# EAGLE board vr2 (EAGLE 4.16)
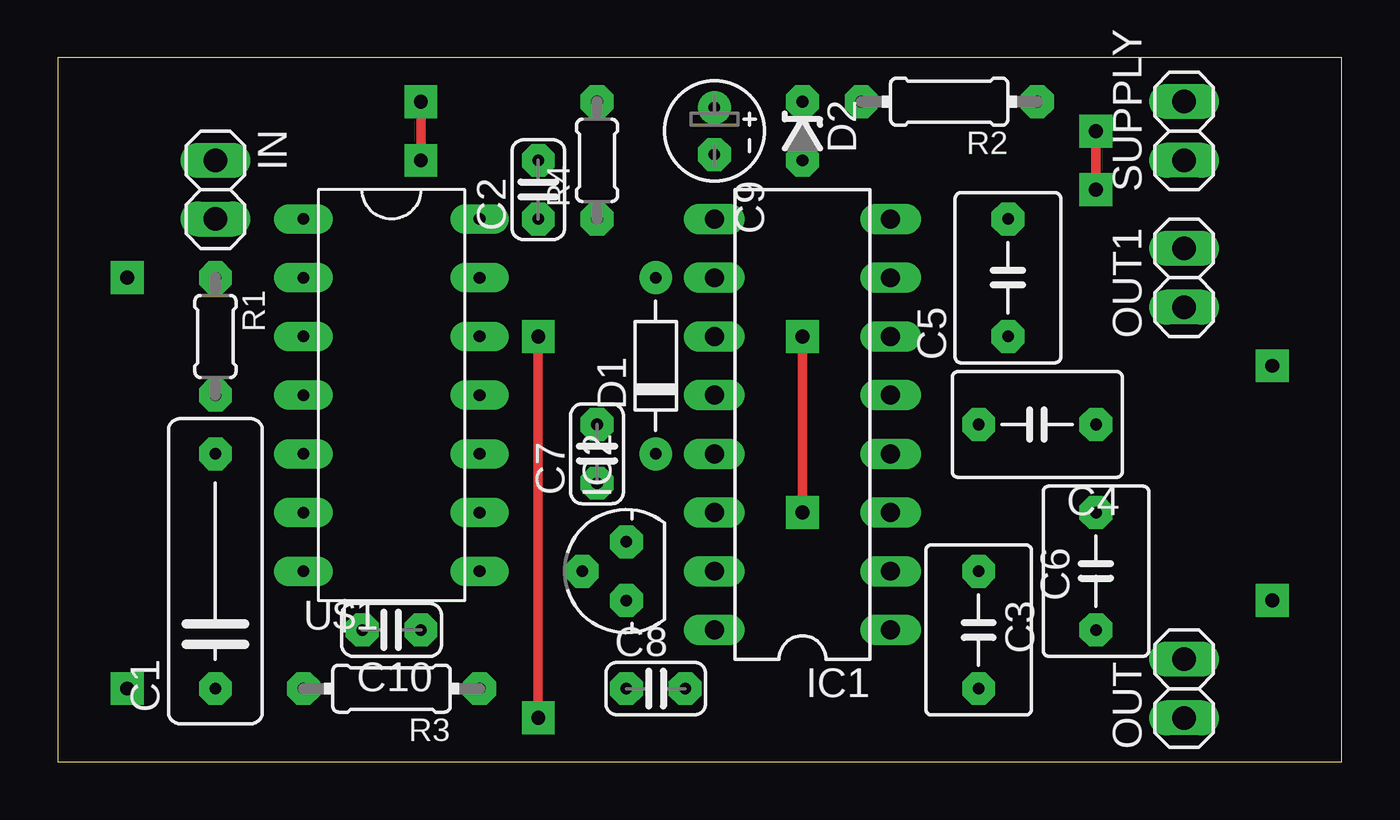
[diagram p0: board, top side]
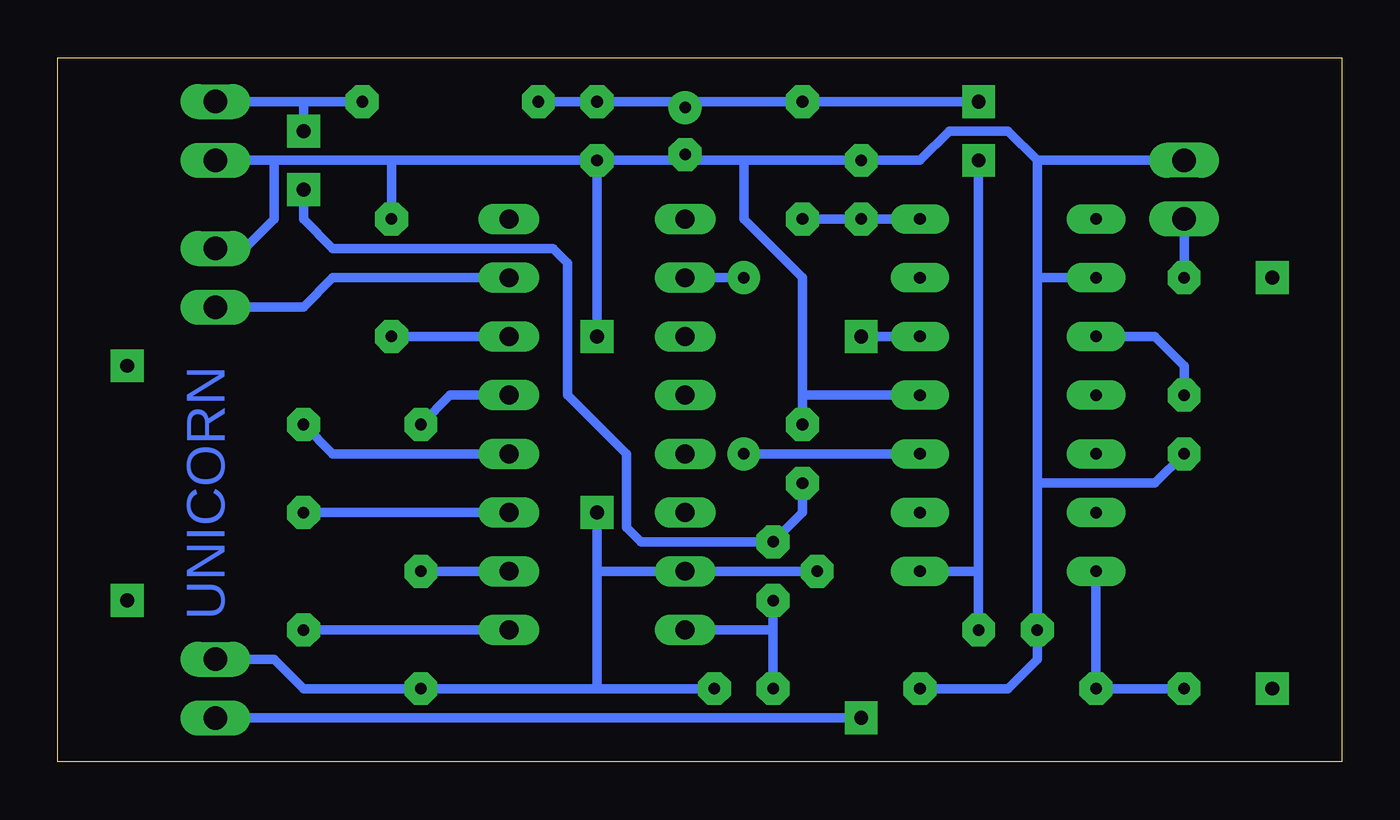
[diagram p1: board, bottom side, seen from below]

Size 55.55 x 30.47 mm. Coordinates in mm from the lower left corner, seen from the top.
Outline: 0,0 55.55,0 55.55,30.47 0,30.47 0,0
Copper layers (1*16): Top 0.035mm / dielectric 1.5mm / Bottom 0.035mm
Design rules "default": minimum track width 10mil, minimum drill 24mil, track to track 8mil, track to pad 8mil, pad to pad 8mil, via to via 8mil, smd to smd 8mil, copper to edge 40mil, drill to drill 8mil, minimum pad ring 10mil, minimum via ring 8mil, stop-mask expansion 4mil, vias tented up to drill 0mil, thermal gap 10mil

## Footprints (pad centres in the part's own frame; a part is rotated, then mirrored left to right if it is on the bottom)
C102-043X133 = drill 0.5 pad 1.422 octagon: 1 -5.08,0; 2 5.08,0
C025-024X044 = drill 0.5 pad 1.422 octagon: 1 -1.27,0; 2 1.27,0
C050-045X075 = drill 0.5 pad 1.422 octagon: 1 -2.54,0; 2 2.54,0
E2-4 = drill 0.5 pad 1.422 round: + -1.016,0 | drill 0.5 pad 1.422 octagon: - 1.016,0
D-7.5 = drill 0.5 pad 1.422 round: A 3.81,0; C -3.81,0
ZDIO-2.5 = drill 0.5 pad 1.422 octagon: A 1.27,0; C -1.27,0
DIL16 = drill 0.813 long: 1 -8.89,-3.81; 2 -6.35,-3.81; 3 -3.81,-3.81; 4 -1.27,-3.81; 5 1.27,-3.81; 6 3.81,-3.81; 7 6.35,-3.81; 8 8.89,-3.81; 9 8.89,3.81; 10 6.35,3.81; 11 3.81,3.81; 12 1.27,3.81; 13 -1.27,3.81; 14 -3.81,3.81; 15 -6.35,3.81; 16 -8.89,3.81
78LXX = drill 0.5 pad 1.422 octagon: GND 0,1.905; IN 1.27,0; OUT -1.27,0
1X02 = drill 1.016 long: 1 -1.27,0; 2 1.27,0
0204/5 = drill 0.5 pad 1.422 octagon: 1 -2.54,0; 2 2.54,0
0204/7 = drill 0.5 pad 1.422 octagon: 1 -3.81,0; 2 3.81,0
DIL14 = drill 0.5 pad 1.27 long: 1 -3.81,7.62; 2 -3.81,5.08; 3 -3.81,2.54; 4 -3.81,0; 5 -3.81,-2.54; 6 -3.81,-5.08; 7 -3.81,-7.62; 8 3.81,-7.62; 9 3.81,-5.08; 10 3.81,-2.54; 11 3.81,0; 12 3.81,2.54; 13 3.81,5.08; 14 3.81,7.62

## Placement (x,y rotation side)
C1  100n  [C102-043X133]  6.82,8.25 90 top
C2  2n  [C025-024X044]  20.79,24.76 90 top
C3  1u  [C050-045X075]  44.92,8.25 90 top
C4  1u  [C050-045X075]  42.38,14.6 180 top
C5  1u  [C050-045X075]  41.11,20.95 90 top
C6  1u  [C050-045X075]  39.84,5.71 270 top
C7  100n  [C025-024X044]  23.33,13.33 90 top
C8  100n  [C025-024X044]  25.87,3.17 0 top
C9  [E2-4]  28.41,27.3 270 top
C10  100n  [C025-024X044]  14.44,5.71 180 top
D1  [D-7.5]  25.87,17.14 90 top
D2  [ZDIO-2.5]  32.22,27.3 270 top
IC1  MAX232  [DIL16]  32.22,14.6 90 top
IC2  [78LXX]  24.6,8.25 90 top
IN  [1X02]  6.82,24.76 270 top
OUT  [1X02]  48.73,3.17 90 top
OUT1  [1X02]  48.73,20.95 90 top
R1  18k  [0204/5]  6.82,18.41 270 top
R2  100  [0204/7]  38.57,28.57 180 top
R3  710k  [0204/7]  14.44,3.17 180 top
R4  150k  [0204/5]  23.33,26.03 90 top
SUPPLY  [1X02]  48.73,27.3 90 top
U$1  LM1815  [DIL14]  14.44,15.87 0 top

## Library data of the parts
C1-C10 R1-R4 = rcl
D1 D2 = diode
IC1 = maxim
IC2 = v-reg
IN OUT OUT1 SUPPLY = pinhead
U$1 = rnie04

## Nets
0V: C1.2 C2.2 C5.2 C6.2 C7.2 C8.2 C9.- C10.2 D2.A IC1.15 IC2.GND IN.1 OUT1.2 OUT.2 R3.1 SUPPLY.1 U$1.2 U$1.11
+5V: C8.1 IC1.16 IC2.OUT
+12V: C9.+ C10.1 D2.C R2.2 R4.2 U$1.8
+15V: C7.1 IC2.IN R2.1 SUPPLY.2
N$1: R1.2 U$1.3
N$2: OUT.1 U$1.12
N$3: C1.1 R3.2 U$1.7
N$4: C4.2 IC1.5
N$5: C2.1 R4.1 U$1.14
N$6: IN.2 R1.1
N$7: C4.1 IC1.4
N$8: C3.2 IC1.3
N$9: C3.1 IC1.1
N$10: C6.1 IC1.2
N$11: C5.1 IC1.6
N$12: D1.C U$1.10
N$13: D1.A IC1.10
N$14: IC1.7 OUT1.1

## Tracks (layer width: path | path; a pad name or v marks a point on that pad's centre or on a via)
0V  (via drill 0.6 pad 1.42)
  Top 0.406: v32.22,18.41 v32.22,10.79
  Bottom 0.406: 13.17,20.95 U$1.2 | 13.17,26.03 14.44,27.3 16.98,27.3 18.25,26.03 C2.2 25.87,26.03 | 13.17,20.95 13.17,26.03 | 32.22,3.17 C6.2 44.92,3.17 46.19,4.44 OUT.2 | 32.22,8.25 32.22,3.17 | 32.22,8.25 IC1.15 IC2.GND | 25.87,26.03 28.41,26.03 | 13.17,26.03 IN.1 | 32.22,3.17 C8.2 | D2.A 41.11,26.03 | 41.11,26.03 46.19,26.03 | 46.19,26.03 SUPPLY.1 | D2.A v32.22,18.41 | v32.22,10.79 32.22,8.25 | 41.11,26.03 C5.2 | 28.41,26.03 C9.- | 28.41,26.03 D2.A | 23.33,15.87 C7.2 | OUT1.2 47.46,22.22 46.19,23.49 46.19,26.03 | 13.17,12.06 C10.2 13.17,4.44 14.44,3.17 R3.1 | 13.17,12.06 13.17,20.95 | 13.17,12.06 8.09,12.06 C1.2 | 23.33,15.87 U$1.11 | 23.33,15.87 23.33,20.95 25.87,23.49 25.87,26.03
+5V
  Bottom 0.406: 24.6,5.71 IC2.OUT | 24.6,5.71 IC1.16 | C8.1 24.6,5.71
+12V  (via drill 0.6 pad 1.42)
  Top 0.406: v15.71,26.03 v15.71,28.57
  Bottom 0.406: R2.2 D2.C 28.41,28.57 | 28.41,28.57 R4.2 v15.71,28.57 | 28.41,28.57 C9.+ | C10.1 15.71,8.25 | U$1.8 15.71,8.25 | 15.71,8.25 v15.71,26.03
+15V  (via drill 0.6 pad 1.42)
  Top 0.406: v44.92,24.76 v44.92,27.3
  Bottom 0.406: 44.92,28.57 R2.1 | 44.92,28.57 SUPPLY.2 | C7.1 23.33,10.79 IC2.IN 30.32,9.52 30.95,10.15 30.95,13.33 33.49,15.87 33.49,21.59 34.12,22.22 43.65,22.22 44.92,23.49 v44.92,24.76 | v44.92,27.3 44.92,28.57
N$1
  Bottom 0.406: R1.2 6.82,17.14 8.09,18.41 U$1.3
N$2  (via drill 0.6 pad 1.42)
  Top 0.406: v20.79,1.9 v20.79,18.41
  Bottom 0.406: v20.79,18.41 U$1.12 | v20.79,1.9 OUT.1
N$3
  Bottom 0.406: C1.1 R3.2 U$1.7
N$4
  Bottom 0.406: IC1.5 38.57,15.87 C4.2
N$5
  Bottom 0.406: U$1.14 C2.1 R4.1
N$6
  Bottom 0.406: R1.1 IN.2
N$7
  Bottom 0.406: IC1.4 43.65,13.33 C4.1
N$8
  Bottom 0.406: IC1.3 C3.2
N$9
  Bottom 0.406: IC1.1 C3.1
N$10
  Bottom 0.406: IC1.2 C6.1
N$11
  Bottom 0.406: IC1.6 C5.1
N$12
  Bottom 0.406: U$1.10 D1.C
N$13
  Bottom 0.406: D1.A IC1.10
N$14
  Bottom 0.406: IC1.7 43.65,20.95 44.92,19.68 OUT1.1
N$15  (via drill 0.6 pad 1.42)
  other vias: 52.54,6.98
N$16  (via drill 0.6 pad 1.42)
  other vias: 3.01,20.95
N$17  (via drill 0.6 pad 1.42)
  other vias: 3.01,3.17
N$18  (via drill 0.6 pad 1.42)
  other vias: 52.54,17.14

## Text on the board
Bottom: UNICORN